# Altium PCB PowerBoard.PcbDoc
Units mm, origin at the board's own origin, x right, y up, seen from the top; angles counter-clockwise.
Board outline 50.8 x 45 mm, 2 copper layers (Top Layer, Bottom Layer); 27 components, 11 nets, 62 pads, 1 vias.
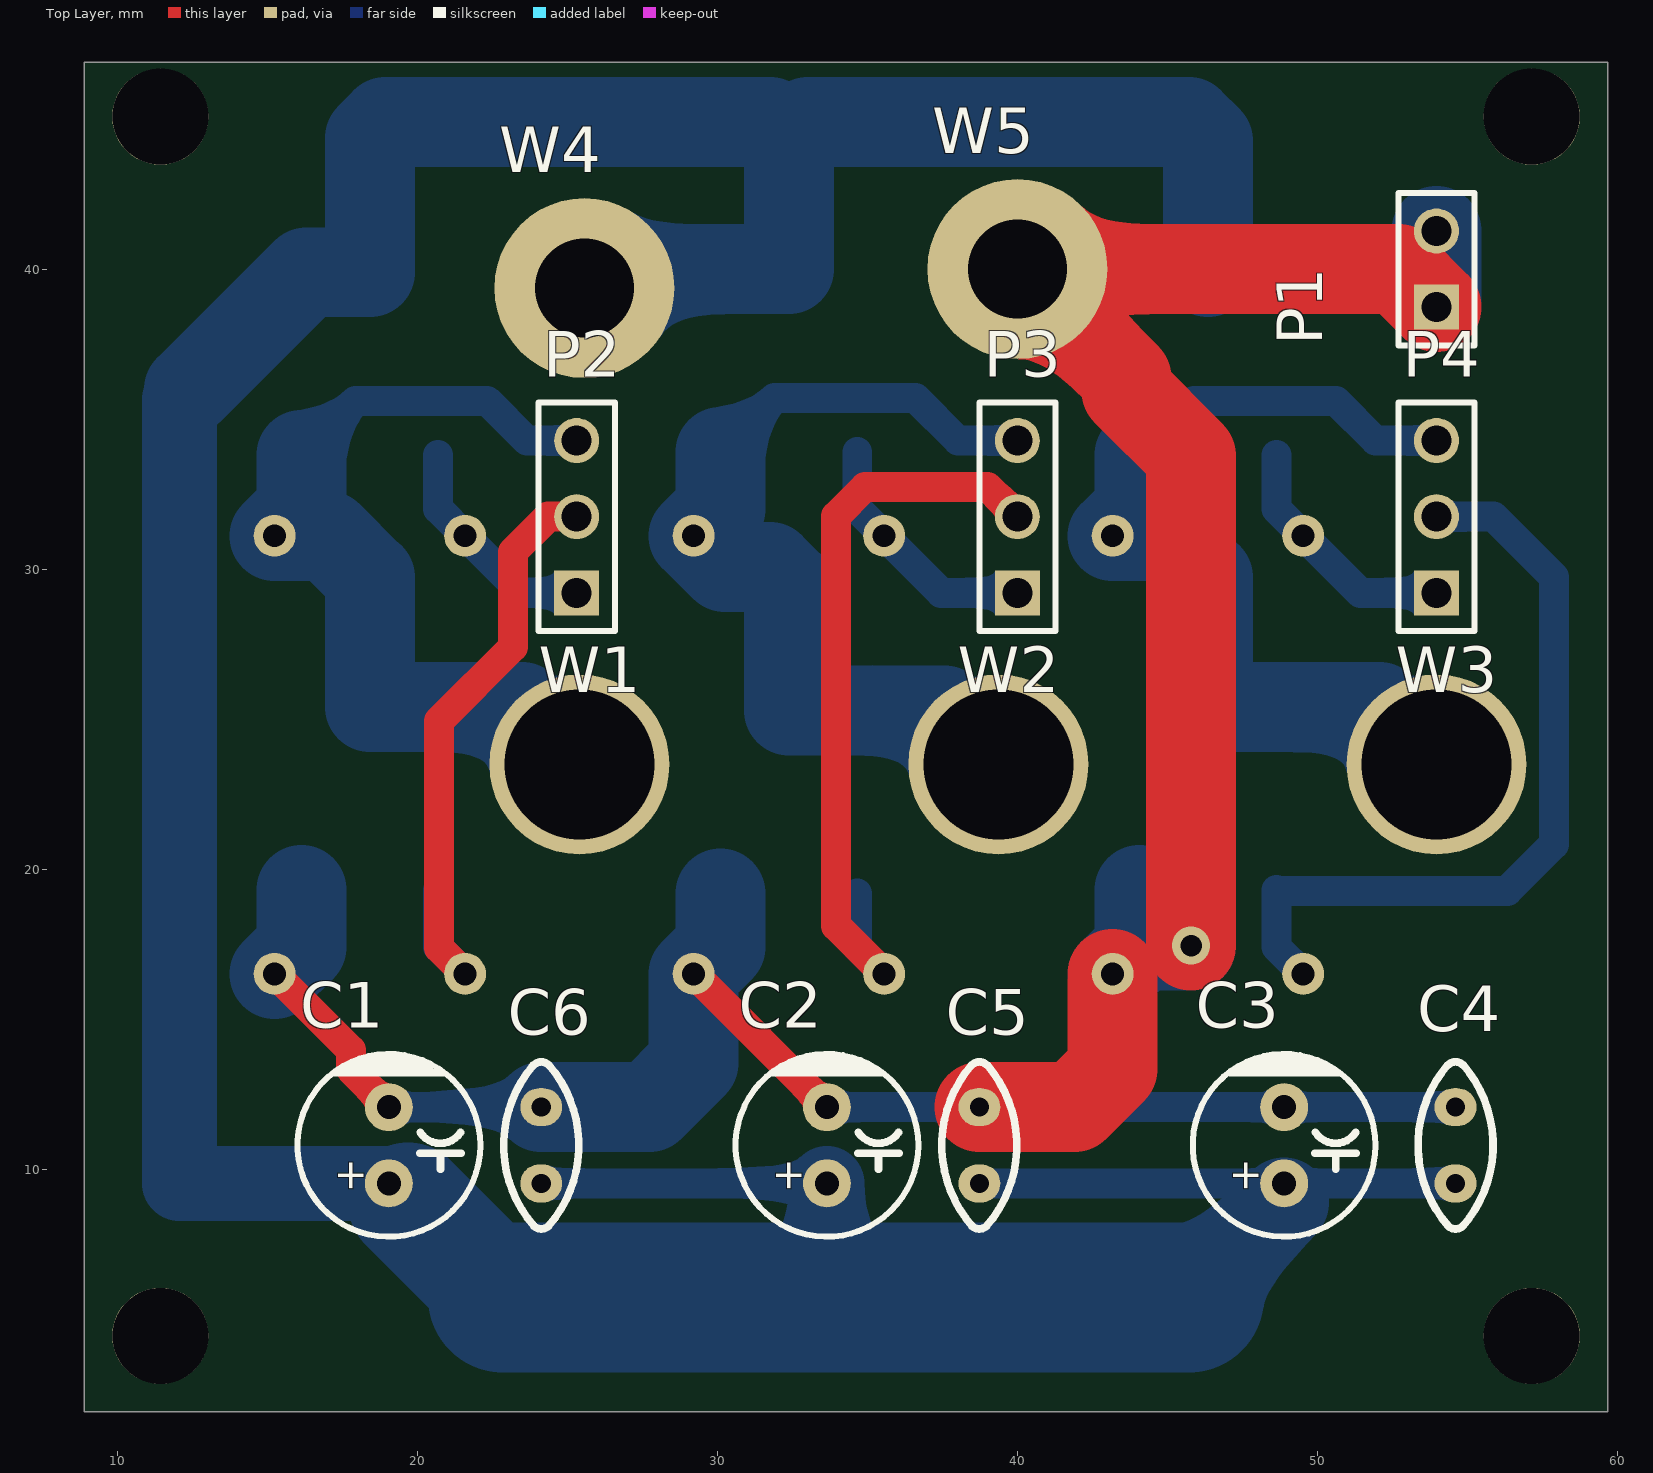
[diagram p0: Top Layer view]
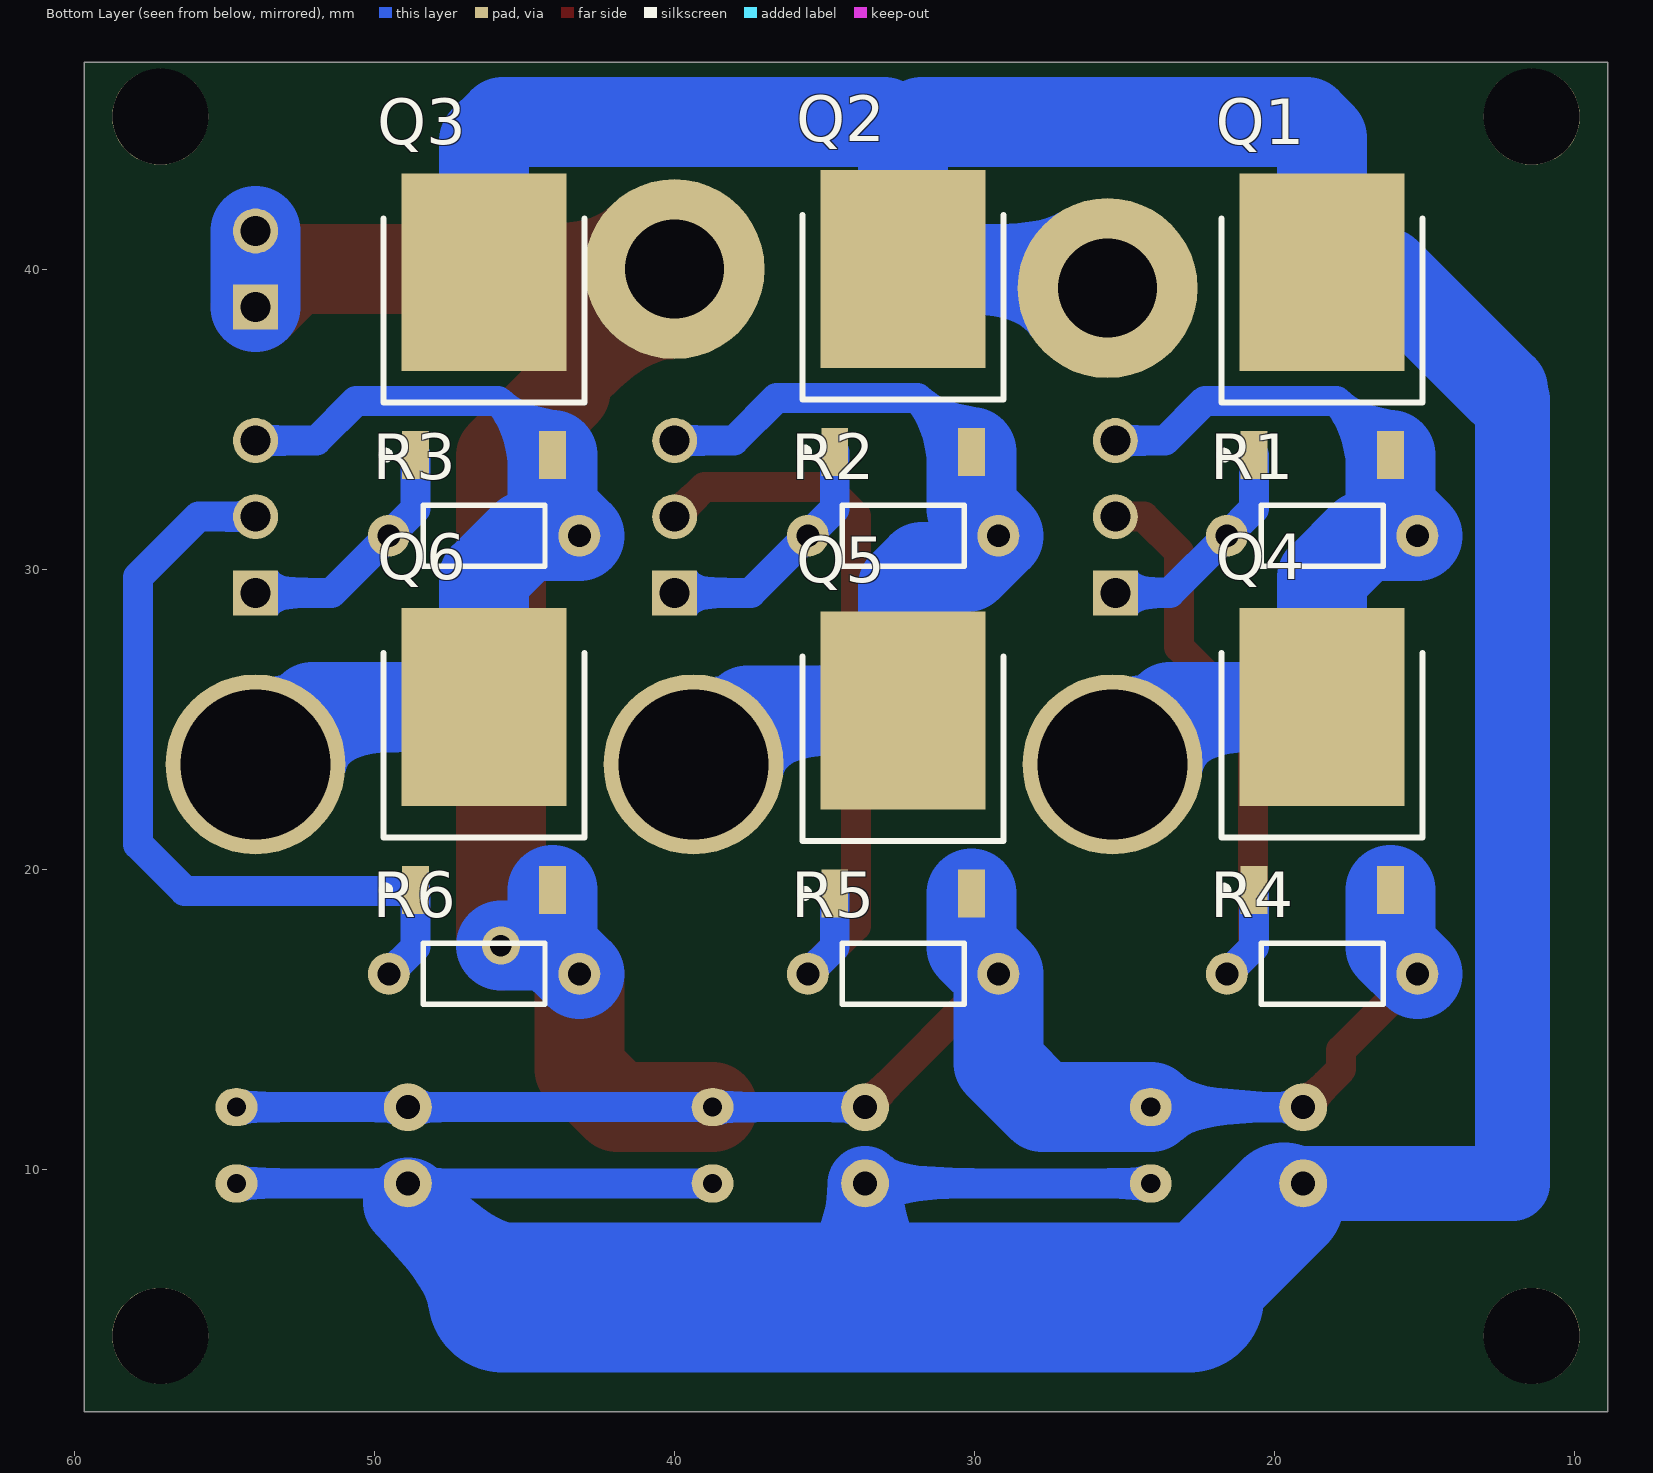
[diagram p1: Bottom Layer view, seen from below]
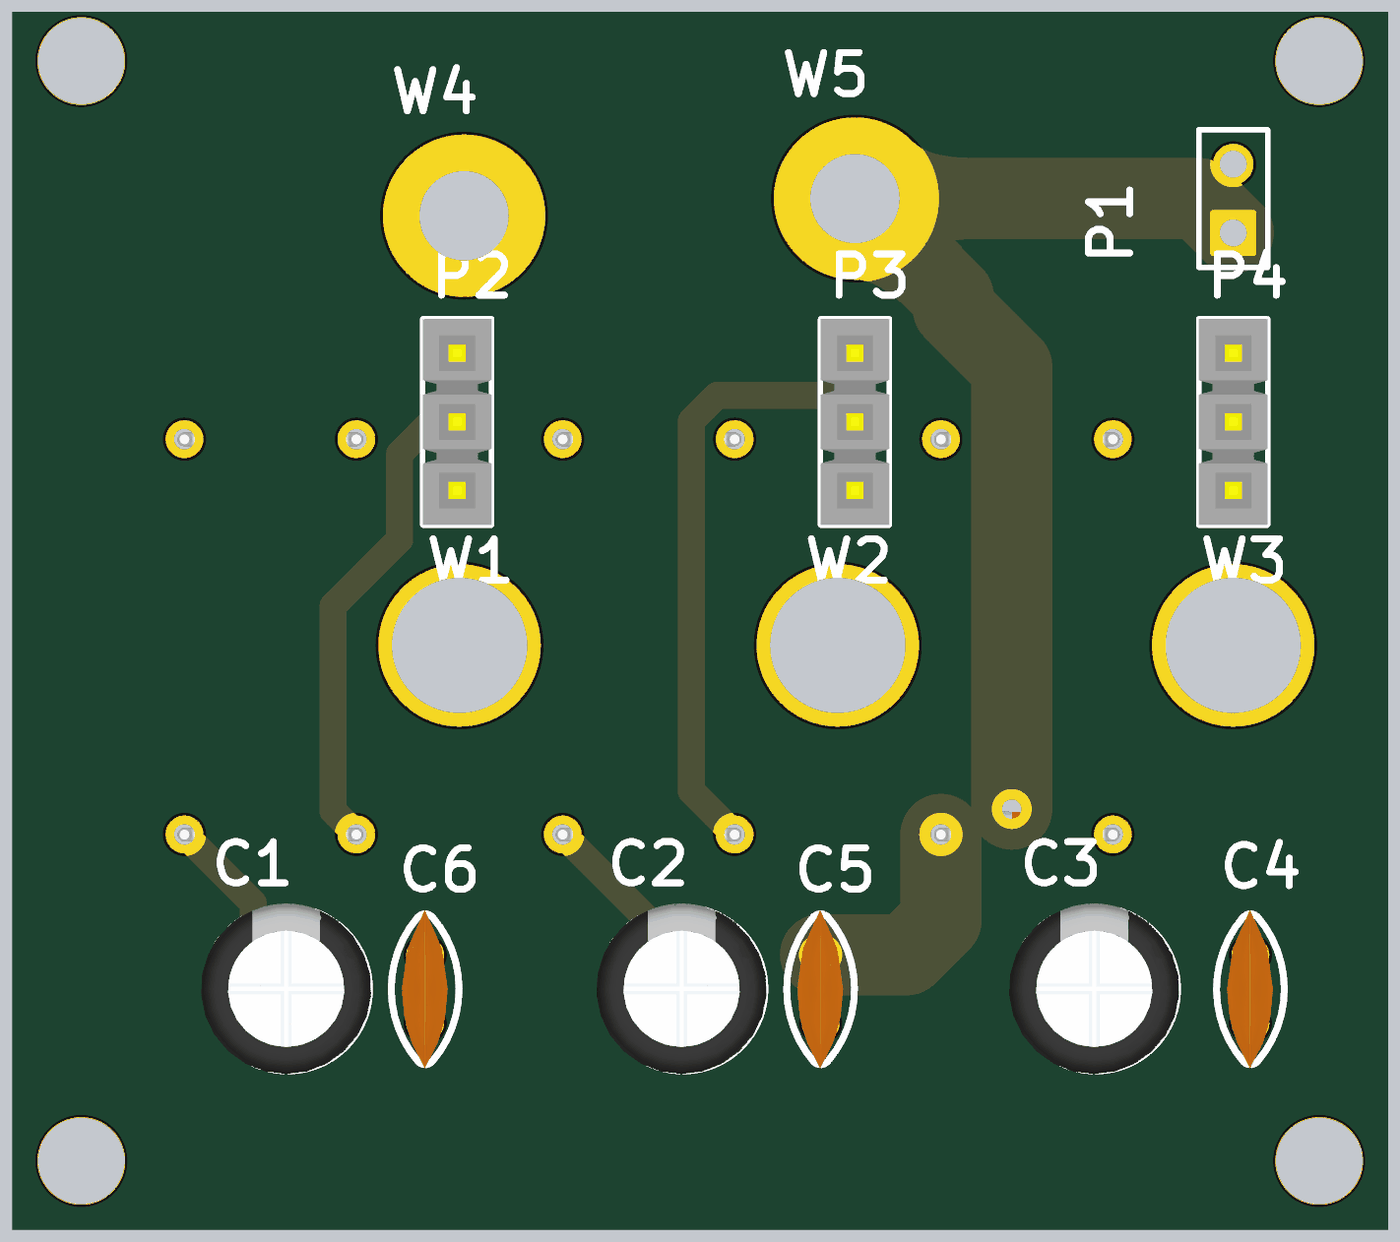
[diagram p2: 3D render of the assembled board from above, using the file's embedded part models]
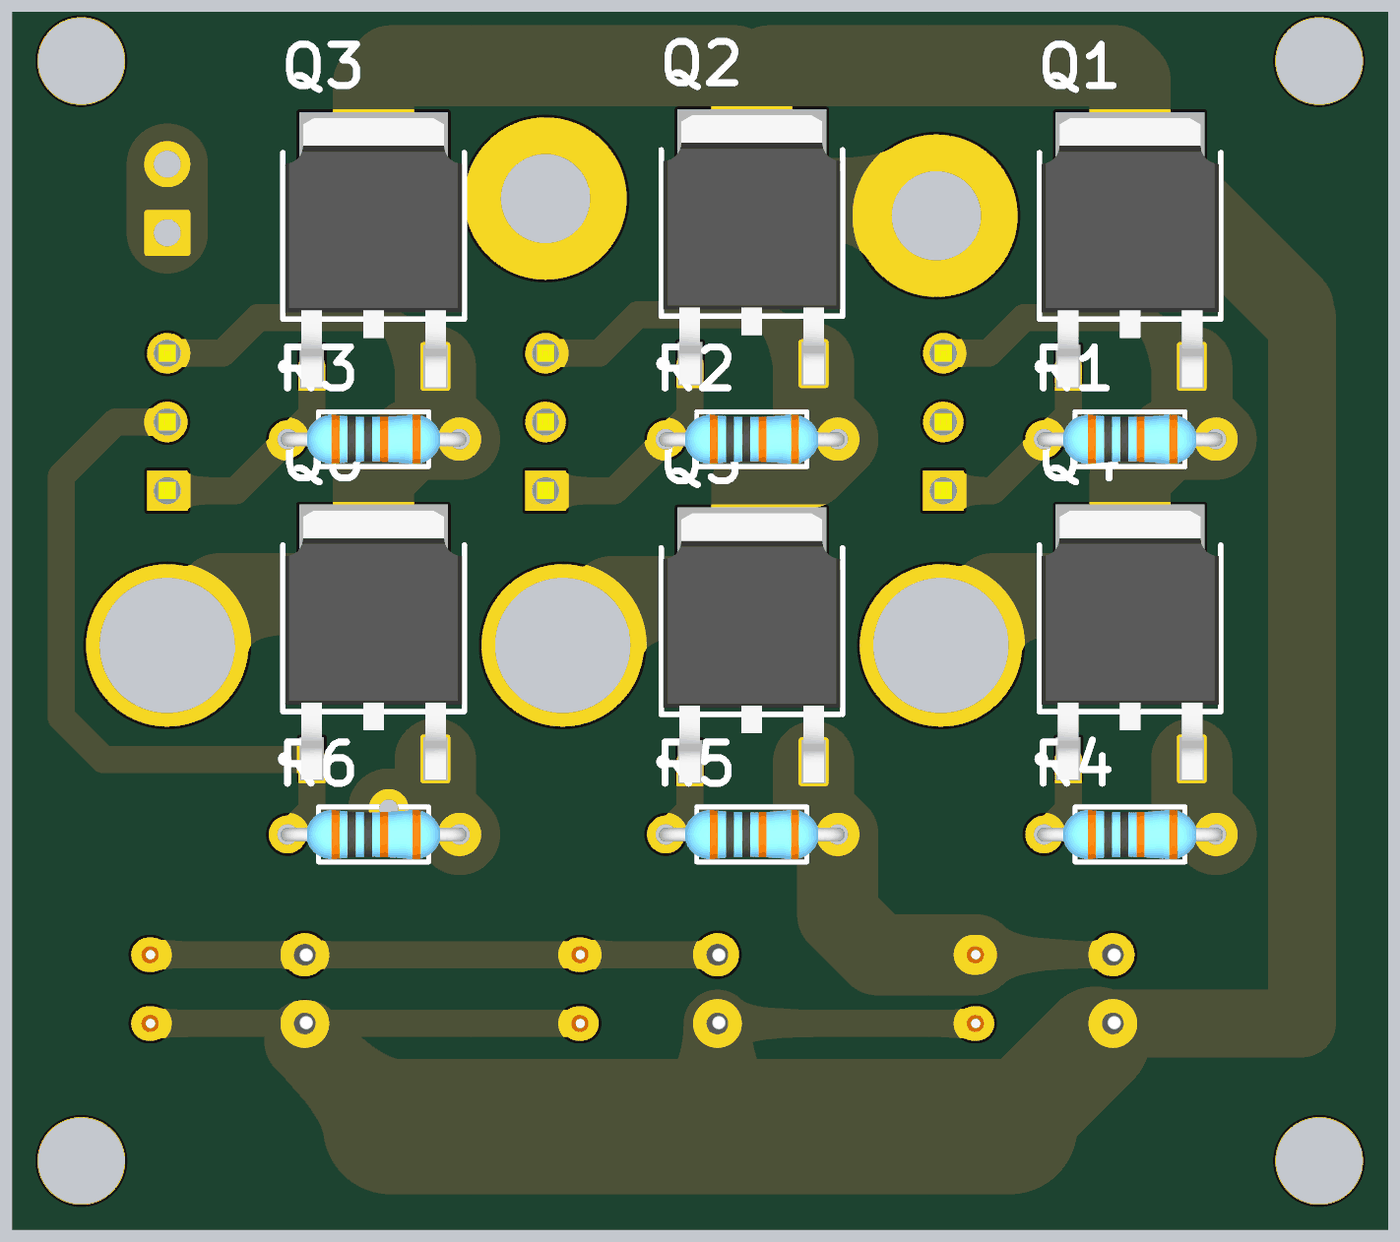
[diagram p3: 3D render of the assembled board from below, using the file's embedded part models]

## Layer stack, top to bottom
Top Solder: solder mask 0.0102, Solder Resist, Dk 3.5
Top Layer: signal copper 0.0356
Dielectric1: dielectric 0.32, FR-4, Dk 4.8
Bottom Layer: signal copper 0.0356
Bottom Solder: solder mask 0.0102, Solder Resist, Dk 3.5

## Board outline
8.89,1.905 8.89,46.906 59.69,46.906 59.69,1.905

## Design rules (kind name [scope] priority, off if disabled: settings)
Clearance [All] p1: gap=0.4 ignorepadtopadclearanceinfootprint=TRUE
PolygonConnect [All] p1: connectstyle=Relief reliefconductorwidth=0.254 reliefentries=4 polygonreliefangle="90 Angle" airgapwidth=0.254
RoutingVias [All] p1: holewidth=0.711 width=1.27 viastyle="Through Hole" minholewidth=0.711 minwidth=1.27 maxholewidth=0.711 maxwidth=1.27
SilkToSolderMaskClearance SilkscreenOverComponentPads [IsPad] p1: minsilkscreentomaskgap=0.254 clearancetoexposedcopper=TRUE
SolderMaskExpansion [All] p1: expansion=0.102
Width [All] p1: maxlimit=10 minlimit=0.6 preferedwidth=1
29 further rules are at their usual default settings.

## Components (designator, comment, footprint, x,y, rotation, side; value= is the part's Value field where it differs from the comment)
C1 "100uF" "Cap electrolitic radial 6.3x12-2.5" 19.05,9.525 r90 top value=1uF
C2 "100uF" "Cap electrolitic radial 6.3x12-2.5" 33.655,9.525 r90 top value=1uF
C3 "100uF" "Cap electrolitic radial 6.3x12-2.5" 48.895,9.525 r90 top value=1uF
C4 "100nF" Cap-100nF 54.61,10.795 r270 top
C5 "100nF" Cap-100nF 38.735,10.795 r270 top
C6 "100nF" Cap-100nF 24.13,10.795 r270 top
P1 "Header 2" HDR1X2 53.975,38.735 r90 top
P2 "Header 3" HDR1X3 25.314,29.21 r90 top
P3 "Header 3" HDR1X3 40.005,29.21 r90 top
P4 "Header 3" HDR1X3 53.975,29.21 r90 top
Q1 "FDD6690" TO252-3L 18.415,38.1 r90 bottom
Q2 "FDD6690" TO252-3L 32.385,38.205 r90 bottom
Q3 "FDD6690" TO252-3L 46.355,38.1 r90 bottom
Q4 "FDD6690" TO252-3L 18.415,23.6 r90 bottom
Q5 "FDD6690" TO252-3L 32.385,23.495 r90 bottom
Q6 "FDD6690" TO252-3L 46.355,23.6 r90 bottom
R1 "1K" RES-(1/4) 18.415,31.115 r180 bottom
R2 "1K" RES-(1/4) 32.385,31.115 r180 bottom
R3 "1K" RES-(1/4) 46.355,31.115 r180 bottom
R4 "1K" RES-(1/4) 18.415,16.51 r180 bottom
R5 "1K" RES-(1/4) 32.385,16.51 r180 bottom
R6 "1K" RES-(1/4) 46.355,16.51 r180 bottom
W1 "*" "wire 1.5 mm"#1 25.4,23.495 r0 top
W2 "*" "wire 1.5 mm"#1 39.37,23.495 r0 top
W3 "*" "wire 1.5 mm"#1 53.975,23.495 r0 top
W4 "*" "wire 1.5 mm"#2 25.568,39.37 r0 top
W5 "*" "wire 1.5 mm"#2 40.005,40.005 r0 top

## Footprints (in the part's own frame and the unit in brackets; to place one, negate y for a bottom-side part, rotate by r counter-clockwise, add the part's x,y. Pads: shape width x height; smd on the part's side, far side on the other; paste and mask are expansions set on the pad)
"Cap electrolitic radial 6.3x12-2.5" [mm] "Capacitor Electrolytic D=6.3 x H=12 - P=2.5 mm, Altium Compatible"
  round 1.6 hole 0.8: 1(0,0) 2(2.54,0)
  silkscreen extent -1.78,-3.05 4.32,3.04, body extent -1.87,-3.09 4.43,3.2, height 1.2
Cap-100nF [mil] "Bipolar Capacitor-Design:Ali Hafizi"
  oval 50x55 hole 25: 1(-50,0) 2(50,0)
  silkscreen extent -110,-49 110,49, body extent -115,-34 115,33, height 272
HDR1X2 [mm] "Connector; Header; 2 Position"
  rect 1.5x1.5 hole 1: 1(0,0)
  round 1.5 hole 1: 2(2.54,0)
  silkscreen extent -1.27,-1.27 3.81,1.27
HDR1X3 [mm] "Connector; Header; 3 Position"
  rect 1.5x1.5 hole 1: 1(0,0)
  round 1.5 hole 1: 2(2.54,0) 3(5.08,0)
  silkscreen extent -1.27,-1.27 6.35,1.27, body extent -1.26,-1.27 6.36,1.27, height 8.38
RES-(1/4) [mil]
  round 55 hole 30: 1(-125,0) 2(125,0)
  silkscreen extent -80,-40 80,40, body extent -135,-36 135,36, height 115
TO252-3L [mm] "D-PAK, 3-Pads, Body 6.2x6.7mm (max), IPC High Density"
  rect 1.6x0.9 smd: 1(-4.3,2.28) 3(-4.3,-2.28)
  rect 6.6x5.5 smd: 4(1.8,0)
  silkscreen extent -4.42,-3.35 3.6,3.41, body extent -5.06,-3.27 4.88,3.27, height 2.39
"wire 1.5 mm"#1 [mm]
  round 6 hole 5: 1(0,0)
  body extent -1.09,-1.1 1.1,1.1, height 5.2
"wire 1.5 mm"#2 [mm]
  round 6 hole 3.3: 1(0,0)
  body extent -1.09,-1.1 1.1,1.1, height 5.2

## Part data
C1 C2 C3: library part "Cap ELECTROLITIC TOTAL SIZE", "Cap electrolitic radial", Data=16-12-2016, Designer="Abbas Basereh"
C4 C5 C6: library part "CAP CERAMIC TOTAL SIZE", "CAP Ceramic Total", Designer="Ali Hafizi"
P1: "Header, 2-Pin", LatestRevisionDate=17-Jul-2002, LatestRevisionNote="Re-released for DXP Platform.", Publisher="Altium Limited"
P2 P3 P4: "Header, 3-Pin", LatestRevisionDate=17-Jul-2002, LatestRevisionNote="Re-released for DXP Platform.", Publisher="Altium Limited"
Q1 Q2 Q3 Q4 Q5 Q6: library part P0903BDG, "N-channel MOSFET", ComponentLink1Description="Manufacturer Link", ComponentLink2Description=Datasheet, ComponentLink2URL=http://www.roboeq.ir/files/id/2909/name/P0903BDG.pdf/, DatasheetVersion=2017-1-12, Note="Pin 2 is trimmed (and not drawn) and is electrically connected to Drain", PackageDescription="D-PAK TO-252", PackageReference="D-PAK TO-252", PackageVersion=2017-1-12, Published=2017-1-12, Publisher="Abbas Basereh"
R1 R2 R3 R4 R5 R6: library part "RES DIP PACKAGE", "TOTAL DIP RESISTOR PACK", Designer="Ali Hafizi"
W1 W2 W3 W4 W5: library part "Single Wire", "A Customize Component For Single Wire Connection", Color=Blue, Adding Date=1388/04/05, Company="IPA Co", Designer="Saeid Jorablo", Diameter=Wrie

## Free pads (board coordinates)
  round 3.2 hole 3.2: 0(11.43,4.445) 0(11.43,45.085) 0(57.15,4.445) 0(57.15,45.085)

## Via types
v1: diameter 1.27, hole 0.711, Top Layer to Bottom Layer, 1 vias

## Nets (pads, with @x,y where several pads share a name; then routed paths per layer and width w, separated by ;. In a path a pad name is that pad's centre, name@x,y a point inside that pad or via, vN(x,y) a via of type N, cw(c..) or ccw(c..) an arc to the next point about the centre after c; other vN are vias at no path point)
GND: C1.2 C2.2 C3.2 C4.1 C5.1 C6.1 P1.1 P1.2 Q4.3 Q5.3 Q6.3 R4.2 R5.2 R6.2 W5.1 | length 108.2
  Top Layer w1: R4.2 17.78,13.97 17.78,13.335 C1.2 ; R5.2 C2.2
  Top Layer w3: C5.1 41.91,12.065 43.18,13.335 R6.2 ; v1(45.796,17.45) 45.796,33.782 43.637,35.941 43.637,36.373 W5.1 52.705,40.005 P1.1
  Bottom Layer w1: C1.2 C6.1 ; C2.2 C5.1 C3.2 C4.1
  Bottom Layer w3: R4.2 16.135,17.405 Q4.3 ; C6.1 27.737,12.065 29.21,13.538 R5.2 30.105,17.405 Q5.3 ; R6.2 44.075,17.405 44.075,17.45 ; Q6.3 44.075,17.45 ; v1(45.796,17.45) 44.075,17.45 ; P1.1 P1.2
H1: P2.1 Q1.1 R1.1 | length 7.6
  Bottom Layer w1: Q1.1 20.695,32.01 R1.1 23.495,29.21 P2.1
H2: P3.1 Q2.1 R2.1 | length 8.4
  Bottom Layer w1: Q2.1 34.665,32.01 R2.1 37.465,29.21 P3.1
H3: P4.1 Q3.1 R3.1 | length 8.3
  Bottom Layer w1: Q3.1 48.635,32.01 R3.1 51.435,29.21 P4.1
L1: P2.2 Q4.1 R4.1 | length 21.2
  Top Layer w1: R4.1 20.726,17.374 20.726,24.943 23.19,27.407 23.19,30.582 24.359,31.75 P2.2
  Bottom Layer w1: Q4.1 20.695,17.405 R4.1
L2: P3.2 Q5.1 R5.1 | length 25.8
  Top Layer w1: R5.1 33.96,18.11 33.96,31.775 34.925,32.741 39.014,32.741 P3.2
  Bottom Layer w1: Q5.1 34.665,17.405 R5.1
L3: P4.2 Q6.1 R6.1 | length 26.7
  Bottom Layer w1: Q6.1 Q6.1@48.635,19.279 ; R6.1 48.635,17.405 Q6.1@48.635,19.279 ; P4.2 55.88,31.75 57.887,29.743 57.887,20.828 56.337,19.279 Q6.1@48.635,19.279
VDC: C1.1 C2.1 C3.1 C4.2 C5.2 C6.2 Q1.4 Q2.4 Q3.4 W4.1 | length 152.3
  Bottom Layer w1: C6.2 C2.1 ; C5.2 C3.1 C4.2
  Bottom Layer w2.5: 12.395,35.992 12.065,35.662 12.065,9.525 C1.1 19.685,8.89 ; 33.655,5.715 C2.1
  Bottom Layer w3: 12.395,35.992 16.303,39.9 Q1.4 18.415,44.377 18.945,44.907 31.75,44.907 32.385,44.272 ; W4.1 26.203,40.005 Q2.4 32.385,44.272 ; 45.72,5.715 C3.1@48.895,8.89 ; Q3.4 46.355,44.272 45.72,44.907 33.02,44.907 32.385,44.272
  Bottom Layer w4: 19.685,8.89 22.86,5.715
  Bottom Layer w5: 22.86,5.715 33.655,5.715 45.72,5.715
VS1: P2.3 Q1.3 Q4.4 R1.2 W1.1 | length 29.4
  Bottom Layer w1: Q1.3 17.946,35.611 22.327,35.611 23.647,34.29 P2.3
  Bottom Layer w3: Q1.3 16.135,32.01 R1.2 17.018,31.115 18.415,29.718 Q4.4 23.495,25.4 W1.1
VS2: P3.3 Q2.3 Q5.4 R2.2 W2.1 | length 30.1
  Bottom Layer w1: Q2.3 31.912,35.712 36.601,35.712 38.024,34.29 P3.3
  Bottom Layer w3: Q2.3 30.105,32.01 R2.2 30.251,30.074 31.75,30.074 32.385,29.439 Q5.4 37.57,25.295 W2.1
VS3: P4.3 Q3.3 Q6.4 R3.2 W3.1 | length 30.7
  Bottom Layer w1: Q3.3 45.886,35.611 50.622,35.611 51.943,34.29 P4.3
  Bottom Layer w3: Q3.3 44.075,32.01 R3.2 44.958,31.115 46.355,29.718 Q6.4 52.07,25.4 W3.1

## Silkscreen, mask and mechanical layers (free items; w line width, h text height)
Top Overlay:
Mechanical 1:
  lines w0.127: 8.89,1.905 8.89,46.99 59.69,46.99 59.69,27.94 59.69,1.905 8.89,1.905
  lines w0.254: 5.207,3.429 5.715,1.905 ; 5.207,45.466 5.715,46.99 ; 5.461,1.905 5.969,1.905 ; 5.461,46.99 5.969,46.99 ; 5.715,16.424 5.715,1.905 ; 5.715,32.471 5.715,46.99 ; 6.223,3.429 5.715,1.905 ; 6.223,45.466 5.715,46.99 ; 8.89,-0.254 8.89,0.254 ; 10.414,-0.508 8.89,0 ; 10.414,0.508 8.89,0 ; 27.79,0 8.89,0 ; 40.79,0 59.69,0 ; 58.166,-0.508 59.69,0 ; 58.166,0.508 59.69,0 ; 59.69,-0.254 59.69,0.254
  text "45.085 (mm)" at 6.629,16.678 h1.52 r90
  text "50.8 (mm)" at 28.044,-0.914 h1.52

## Text inside footprints (layer, text, board x,y; h text height)
C1: Top Overlay "+" at 18.21,9.205 h1 r90
C2: Top Overlay "+" at 32.815,9.205 h1 r90
C3: Top Overlay "+" at 48.055,9.205 h1 r90